# Altium PCB AntennaSide.PcbDoc
Units mm, origin at the board's own origin, x right, y up, seen from the top; angles counter-clockwise.
Board outline 45 x 20 mm, 2 copper layers (Top Layer, Bottom Layer); 9 components, 4 nets, 31 pads, 8 vias.
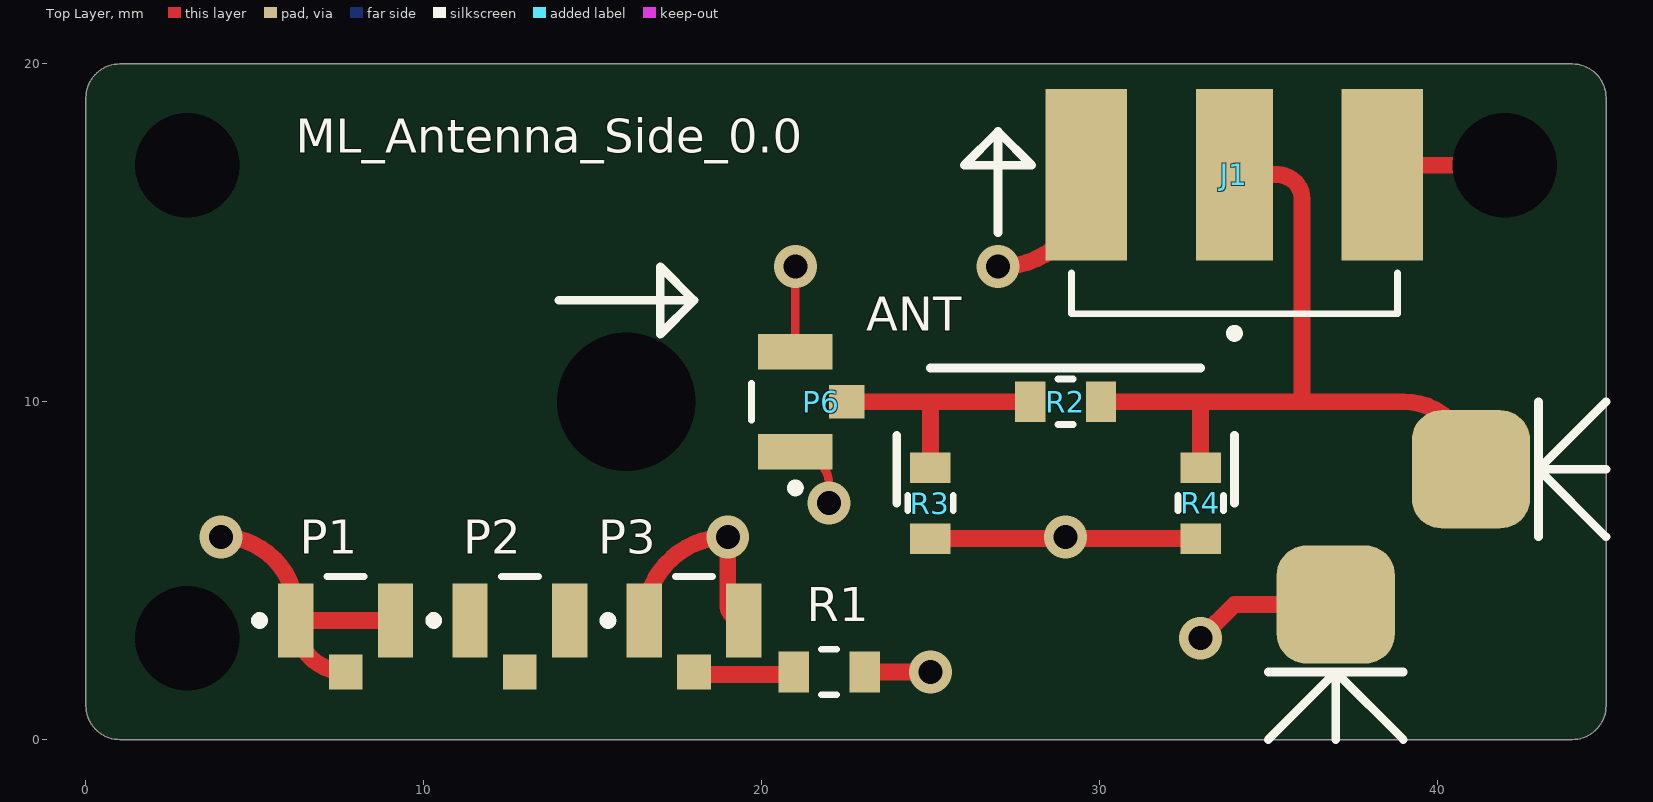
[diagram p0: Top Layer view]
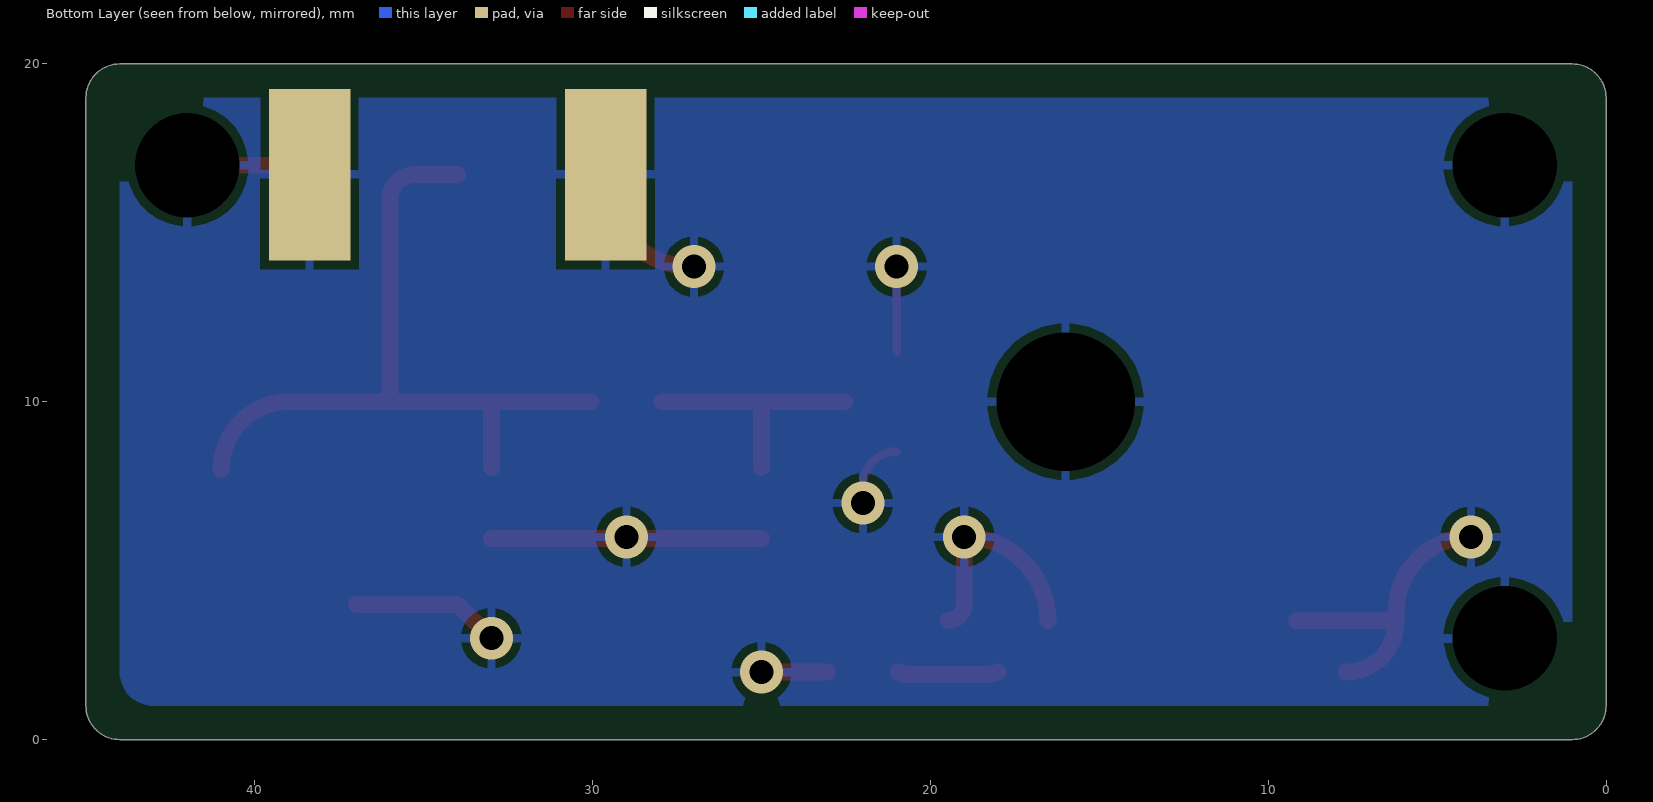
[diagram p1: Bottom Layer view, seen from below]
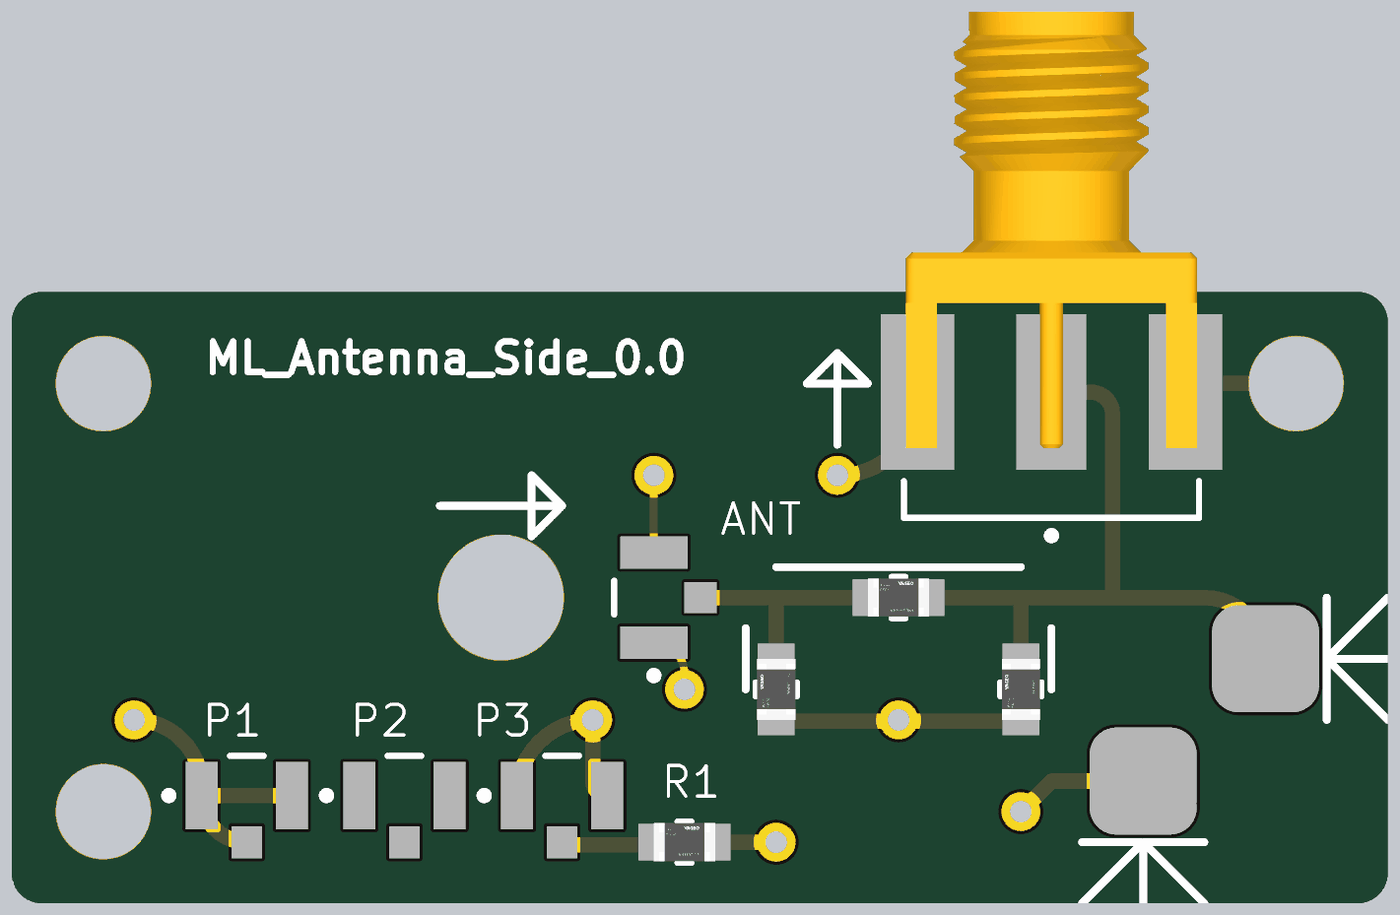
[diagram p2: 3D render of the assembled board from above, using the file's embedded part models]

## Layer stack, top to bottom
Top Solder: solder mask 0.0102, Solder Resist, Dk 3.5
Top Layer: signal copper 0.0356
Dielectric 1: dielectric 0.32, FR-4, Dk 4.8
Bottom Layer: signal copper 0.0356
Bottom Solder: solder mask 0.0102, Solder Resist, Dk 3.5

## Board outline
0,1 0,19 cw(c1,19) 1,20 44,20 cw(c44,19) 45,19 45,1.002 cw(c44,1) 44,0 1,0 cw(c1,1)

## Design rules (kind name [scope] priority, off if disabled: settings)
Clearance [All] p1: gap=0.254 ignorepadtopadclearanceinfootprint=FALSE
HoleSize [All] p1: absolutevalues=TRUE maxlimit=5 minlimit=0.025 maxpercent=80.000 minpercent=20.000
PolygonConnect [All] p1: connectstyle=Relief reliefconductorwidth=0.254 reliefentries=4 polygonreliefangle="90 Angle" airgapwidth=0.254
RoutingVias [All] p1: holewidth=0.711 width=1.27 viastyle="Through Hole" minholewidth=0.711 minwidth=1.27 maxholewidth=0.711 maxwidth=1.27
SolderMaskExpansion [All] p1: expansion=0.102 istentingtop=FALSE
SupplyNets "Schematic Supply Nets" [InNet('GND')] p1: voltage=0.000
Width [All] p1: maxlimit=1 minlimit=0.254 preferedwidth=0.254
29 further rules are at their usual default settings.

## Components (designator, comment, footprint, x,y, rotation, side; value= is the part's Value field where it differs from the comment)
J1 "142-0701-801" FP-142-0701-801-MFG 34,20 r90 top
P1 "U.FL-R-SMT-1(01)" HRS-U.FL-R-SMT-3_V 7.688,3.525 r0 top
P2 "U.FL-R-SMT-1(01)" HRS-U.FL-R-SMT-3_V 12.844,3.525 r0 top
P3 "U.FL-R-SMT-1(01)" HRS-U.FL-R-SMT-3_V 18,3.525 r0 top
P6 "U.FL-R-SMT-1(01)" HRS-U.FL-R-SMT-3_V 21,10 r90 top
R1 "RT0805FRE0722RL" FP-RT0805-MFG 22,2 r0 top value=22Ω
R2 "RT0805FRE0722RL" FP-RT0805-MFG 29,10 r0 top value=22Ω
R3 "RT0805FRE0722RL" FP-RT0805-MFG 25,7 r90 top value=22Ω
R4 "RT0805FRE0722RL" FP-RT0805-MFG 33,7 r90 top value=22Ω

## Footprints (in the part's own frame and the unit in brackets; to place one, negate y for a bottom-side part, rotate by r counter-clockwise, add the part's x,y. Pads: shape width x height; smd on the part's side, far side on the other; paste and mask are expansions set on the pad)
FP-142-0701-801-MFG [mil]
  rect 200x90 smd paste+0 mask+0: 1(-129,0)
  rect 200x95 smd paste+0 mask+0: 2(-129,172.5) 3(-129,-172.5)
  rect 200x95 smd far side paste+0 mask+0: 2(-129,172.5) 3(-129,-172.5)
  silkscreen extent -319,-190 -244,190, body extent -295,-224 295,224, height 10
FP-RT0805-MFG [mm]
  rect 0.9x1.2 smd paste+0 mask+0: 1(-1.05,0) 2(1.05,0)
  silkscreen extent -0.23,-0.67 0.23,0.67, body extent -1.6,-0.77 1.6,0.77, height 0.25
HRS-U.FL-R-SMT-3_V [mm] "SMT, 3-Leads, Body 2.6x2.6mm"
  rect 1.05x2.2 smd: 1(-1.475,0) 2(1.475,0)
  rect 1x1.05 smd: 3(0,-1.525)
  silkscreen extent -2.67,-0.12 0.55,1.3, body extent -1.3,-1.3 1.3,1.3, height 1.25

## Part data
J1: library part CMP-09588-000002-1, "CONN SMA JACK STR 50OHM EDGE MNT", Case/Package=SMA, Frequency=18GHz, Max Operating Temperature=165°C, Min Operating Temperature=-65°C, Operating Frequency="0 to 18 GHz", Package Quantity=5, Voltage Rating=335V, Body Material=Brass, Body Plating=Gold, Connector Type=SMA, Contact Material=Copper, Contact Plating=Gold, Depth=25.58mm, Fastening Type=Threaded, Gender=Female, Impedance=50R, Length=0.44inch, Max Frequency=18GHz, Mount=Edge, Orientation=Straight, Packaging=Bulk, Radiation Hardening=No, RoHS Compliant=Yes, Series=SMA, Termination=Solder
P1 P2 P3 P6: library part CMP-2000-05153-1, "Ultra Small Coaxial Connector, 6 GHz, -40 to 90 degC, 3-Pin SMD, RoHS, Bulk", Dielectric Material=LiquidCrystalPolymer(LCP), Frequency - Max=6GHz, Housing Color=Silver, Manufacturer="Hirose Electric", Operating Temperature=-40degC~90degC, Package Description="3-Pin Surface Mount Device, Body 2.6 x 2.6 mm", Package Reference=U.FL-R-SMT, Standard Package=100, Body Finish=Silver, Body Material=PhosphorBronze, Category=Connectors,Interconnects, Center Contact Material=PhosphorBronze, Center Contact Plating=Gold, Connector Style=U.FL, Connector Type=Jack,MalePin, Contact Termination=Solder, Datasheet URL=https://datasheet.ciiva.com/26945/getdatasheetpartid-475239-26945414.pdf, Datasheet Version=Feb-09, Dynamic Catalog=U.FLSeries, Family=CoaxialConnectors(RF), Fastening Type=Snap-On, Featured Product=HiroseU.FLSeries, Impedance=50Ohm, Manufacturer URL=https://www.hirose.com, Minimum Quantity=UltraMiniatureCoaxial, Mounting Type=SurfaceMount, Online Catalog=U.FLSeries, Other Names="H122041 / U.FL-R-SMT-1(01)-ND", Packaging=Bulk, Quantity Available=Bulk, Series=U.FL, Shield Termination=Solder, Unit PriceUSD=U.FL
R1 R2 R3 R4: library part CMP-03412-009509-1, "RES SMD 22 OHM 1% 1/8W 0805", Manufacturer=Yageo, Package=RT0805, Power Rating=0.125W, Resistance=22Ω, Temperature="-55°C to +155°C", Temperature Coefficient="50 ppm/°C", Temperature Range High=+155°C, Temperature Range Low=-55°C, Tolerance=0.0001, Voltage Rating=150V, Automotive=No, Category=Res, ComponentLink2Description=Datasheet, ComponentLink2URL=http://www.yageo.com/documents/recent/PYu-RT_1-to-0.01_RoHS_L_9.pdf, Composition="Thin Film", Device Class L1="Passive Components", Device Class L2=Resistors, Device Class L3="Chip SMD Resistors", Digikey Description="RES SMD 22 OHM 1% 1/8W 0805", Footprint Url=http://www.yageo.com/exep/pages/download/literatures/PYu-R_Mount_10.pdf, Height=0.6mm, Ipc Land Pattern Name=RESC200125X50, Lead Free=Yes, Manufacturer Part Number=RT0805FRE0722RL, Mouser Description="Thin Film Resistors - SMD 1/8W 22 ohm 1% 50ppm", Octopart=https://octopart.com/rt0805fre0722rl-yageo-39984181, RoHS=TRUE, Series=RT

## Free pads (board coordinates)
  rrect50% 3.5x3.5 smd: 13(37,4) 18(41,8)
  round 1.524 hole 3.1: 14(3,17) 15(3,3) 16(42,17)
  round 1.524 hole 4.1: 17(16,10)

## Via types
v1: diameter 1.27, hole 0.711, Top Layer to Bottom Layer, 8 vias

## Nets (pads, with @x,y where several pads share a name; then routed paths per layer and width w, separated by ;. In a path a pad name is that pad's centre, name@x,y a point inside that pad or via, vN(x,y) a via of type N, cw(c..) or ccw(c..) an arc to the next point about the centre after c; other vN are vias at no path point)
GND: J1.2 J1.3 P1.1 P1.2 P1.3 P3.1 P3.2 P6.1 P6.2 pad.13 pad.14 pad.15 pad.16 pad.17 R1.2 R3.1 R4.1 | length 43
  Top Layer w0.254: P6.1 cw(c21,7.525) 22,7.525 v1(22,7) ; P6.2 v1(21,14)
  Top Layer w0.5: v1@4,5.738 v1(4,6) cw(c4,3.787) 6.213,3.787 P1.1 ; P1.3 cw(c7.688,3.475) 6.213,3.475 P1.1 ; P1.2 P1.1 ; P3.1 cw(c19,3.525) v1(19,6) 19,4 ccw(c19.475,4) P3.2 ; R1.2 v1(25,2) ; R3.1 28.95,5.95 ccw(c28.95,6) v1(29,6) ccw(c29.05,6) 29.05,5.95 R4.1 ; v1(27,14) 27.078,14 ccw(c27.078,16.54) 29.618,16.54 J1.2@29.618,16.723 ; v1(33,3) 34,4 pad.13 ; J1.3@38.381,16.723 38.658,17 pad.16
NetP3_3: P3.3 R1.1 | length 3
  Top Layer w0.5: P3.3 18.25,1.921 18.948,1.921 ; 18.948,1.921 ccw(c18.95,2.425) 18.95,1.921 20.75,1.921 R1.1
NetP6_3: P6.3 R2.1 R3.2 | length 7.4
  Top Layer w0.5: P6.3 25,10 ; R3.2 25,10 ; R2.1 25,10
PT_OUT: J1.1 pad.18 R2.2 R4.2 | length 22.5
  Top Layer w0.5: R2.2 33,10 ; R4.2 33,10 ; J1.1 35.277,16.723 cw(c35.277,16) 36,16 36,10 ; pad.18 ccw(c39,8) 39,10 36,10 ; 33,10 36,10
pads on no net: P2.1 P2.2 P2.3

## Polygon pours and split planes (outlines as drawn)
GND on Bottom Layer "GND_L02_P000" (solid, pour order 0): 2,1 cw(c2,2) 1,2 1,18 cw(c2,18) 2,19 43,19 cw(c43,18) 44,18 44,2 cw(c43,2) 43,1

## Silkscreen, mask and mechanical layers (free items; w line width, h text height)
Top Overlay:
  lines w0.254: 14,13 18,13 ; 24,7 24,9 ; 25,11 33,11 ; 27,15 27,18 ; 34,7 34,9 ; 35,2 37,2 ; 37,0 37,2 ; 39,0 37,2 ; 39,2 37,2 ; 43,6 43,8 ; 43,10 43,8 ; 45,6 43,8 ; 45,10 43,8 ; 18,13 17,12 17,14 18,13 ; 27,18 28,17 26,17 27,18 ; 37,2 35,0 37,2 ; 43,8 45,8 43,8
  text "ML_Antenna_Side_0.0" at 6.204,17.371 h1
  text "ANT" at 23.1,12.1 h1